# EAGLE board ESP-01 Test ver A (EAGLE 7.4.0)
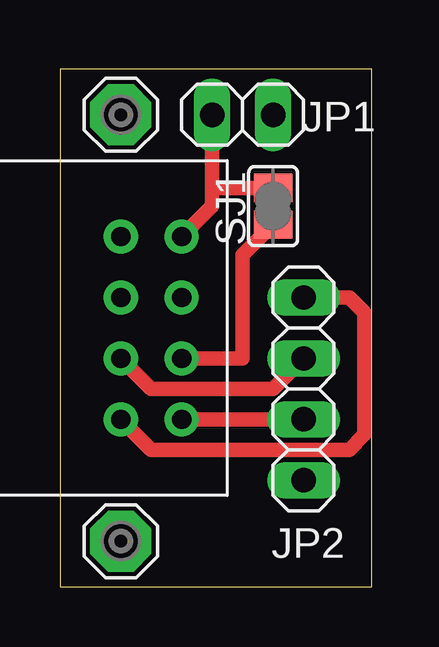
[diagram p0: board, top side]
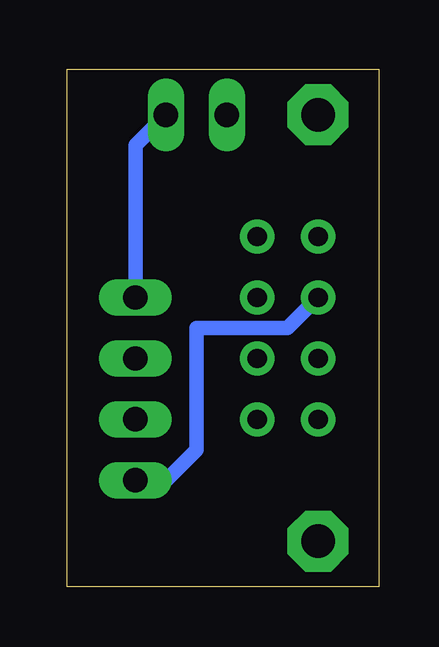
[diagram p1: board, bottom side, seen from below]

Size 13.01 x 21.58 mm. Coordinates in mm from the lower left corner, seen from the top.
Outline: 0,0 13.01,0 13.01,21.58 0,21.58 0,0
Copper layers (1*16): Top 0.035mm / dielectric 1.5mm / Bottom 0.035mm
Design rules "default": minimum track width 10mil, minimum drill 24mil, track to track 8mil, track to pad 8mil, pad to pad 8mil, via to via 8mil, smd to smd 8mil, copper to edge 40mil, drill to drill 8mil, minimum pad ring 10mil, minimum via ring 8mil, stop-mask expansion 4mil, vias tented up to drill 0mil, thermal gap 10mil

## Footprints (pad centres in the part's own frame; a part is rotated, then mirrored left to right if it is on the bottom)
1X02 = drill 1.016 long: 1 -1.27,0; 2 1.27,0
1X04 = drill 1.016 long: 1 -3.81,0; 2 -1.27,0; 3 1.27,0; 4 3.81,0
SE14 = drill 1.397 pad 2.54 octagon: MP 0,0
SJ = smd 1.168 x 1.6: 1 -0.762,0; 2 0.762,0
ESP-01 = drill 0.8 pad 1.422: P$1 0,0; P$2 2.54,0; P$3 5.08,0; P$4 7.62,0; P$5 7.62,2.54; P$6 5.08,2.54; P$7 2.54,2.54; P$8 0,2.54

## Placement (x,y rotation side)
JP1  [1X02]  7.62,19.68 0 top
JP2  [1X04]  10.16,8.26 90 top
LSP1  SE14  [SE14]  2.54,1.91 0 top
LSP2  SE14  [SE14]  2.54,19.68 0 top
SJ1  [SJ]  8.89,15.88 90 top
U$1  ESP8266-01  [ESP-01]  5.08,6.99 90 top

## Library data of the parts
JP1 JP2 = pinhead
LSP1 LSP2 = solpad
SJ1 = jumper
U$1 = #ESP8266

## Nets
GND: JP1.2 JP2.4 U$1.P$8
N$1: JP2.2 U$1.P$1
N$2: SJ1.1 U$1.P$2
N$3: JP1.1 SJ1.2 U$1.P$4
N$4: JP2.3 U$1.P$7
N$5: JP2.1 U$1.P$6

## Tracks (layer width: path | path; a pad name or v marks a point on that pad's centre or on a via)
GND
  Top 0.61: U$1.P$8 3.81,5.71 12.06,5.71 12.7,6.35 12.7,11.43 12.06,12.06 JP2.4
  Bottom 0.61: JP2.4 10.16,18.41 JP1.2
N$1
  Top 0.61: U$1.P$1 JP2.2
N$2
  Top 0.61: U$1.P$2 7.62,9.53 7.62,13.84 SJ1.1
N$3
  Top 0.61: U$1.P$4 6.35,15.88 6.35,16.64 | JP1.1 6.35,16.64 | 6.35,16.64 SJ1.2
N$4
  Top 0.61: U$1.P$7 3.81,8.26 8.89,8.26 JP2.3
N$5
  Bottom 0.61: U$1.P$6 3.81,10.79 7.62,10.79 7.62,5.71 8.89,4.45 JP2.1